# EAGLE board CT_schematic (EAGLE 7.6.0)

Size 100 x 80 mm. Coordinates in mm from the lower left corner, seen from the top.
Outline: 0,0 100,0 100,80 0,80 0,0
Copper layers (1*16): Top 0.035mm / dielectric 1.5mm / Bottom 0.035mm
Design rules "default": minimum track width 10mil, minimum drill 24mil, track to track 8mil, track to pad 8mil, pad to pad 8mil, via to via 8mil, smd to smd 8mil, copper to edge 40mil, drill to drill 8mil, minimum pad ring 10mil, minimum via ring 8mil, stop-mask expansion 4mil, vias tented up to drill 0mil, thermal gap 10mil

## Footprints (pad centres in the part's own frame; a part is rotated, then mirrored left to right if it is on the bottom)
C0603 = smd 0.8 x 0.8: 1 -0.762,0; 2 0.762,0
C0402 = smd 0.5 x 0.5: 1 -0.508,0; 2 0.508,0
2220 = smd 1.85 x 5.5: 1 -2.55,0; 2 2.55,0
C1210 = smd 1.2 x 2.5: 1 -1.524,0; 2 1.524,0
C1206 = smd 1.3 x 1.6: 1 -1.524,0; 2 1.524,0
L0603 = smd 0.8 x 0.8: 1 -0.762,0; 2 0.762,0
R0603 = smd 0.8 x 0.8: 1 -0.762,0; 2 0.762,0
LQFP64 = smd 0.3 x 1.2: 1 -3.75,-5.75; 2 -3.25,-5.75; 3 -2.75,-5.75; 4 -2.25,-5.75; 5 -1.75,-5.75; 6 -1.25,-5.75; 7 -0.75,-5.75; 8 -0.25,-5.75; 9 0.25,-5.75; 10 0.75,-5.75; 11 1.25,-5.75; 12 1.75,-5.75; 13 2.25,-5.75; 14 2.75,-5.75; 15 3.25,-5.75; 16 3.75,-5.75; 33 3.75,5.75; 34 3.25,5.75; 35 2.75,5.75; 36 2.25,5.75; 37 1.75,5.75; 38 1.25,5.75; 39 0.75,5.75; 40 0.25,5.75; 41 -0.25,5.75; 42 -0.75,5.75; 43 -1.25,5.75; 44 -1.75,5.75; 45 -2.25,5.75; 46 -2.75,5.75; 47 -3.25,5.75; 48 -3.75,5.75 | smd 1.2 x 0.3: 17 5.75,-3.75; 18 5.75,-3.25; 19 5.75,-2.75; 20 5.75,-2.25; 21 5.75,-1.75; 22 5.75,-1.25; 23 5.75,-0.75; 24 5.75,-0.25; 25 5.75,0.25; 26 5.75,0.75; 27 5.75,1.25; 28 5.75,1.75; 29 5.75,2.25; 30 5.75,2.75; 31 5.75,3.25; 32 5.75,3.75; 49 -5.75,3.75; 50 -5.75,3.25; 51 -5.75,2.75; 52 -5.75,2.25; 53 -5.75,1.75; 54 -5.75,1.25; 55 -5.75,0.75; 56 -5.75,0.25; 57 -5.75,-0.25; 58 -5.75,-0.75; 59 -5.75,-1.25; 60 -5.75,-1.75; 61 -5.75,-2.25; 62 -5.75,-2.75; 63 -5.75,-3.25; 64 -5.75,-3.75
SOIC-8 = smd 1.6 x 0.6: 1 -2.7,1.905 | smd 1.55 x 0.6: 2 -2.7,0.635; 3 -2.7,-0.635; 4 -2.7,-1.905; 5 2.7,-1.905; 6 2.7,-0.635; 7 2.7,0.635; 8 2.7,1.905
TDFN-8/6MM = smd 0.3 x 0.75: 1 0,0; 2 0.5,0; 3 1,0; 4 1.5,0; 5 1.5,3; 6 1,3; 7 0.5,3; 8 0,3
QFN-32 = smd 0.6 x 0.3: 1 -2.3,1.75; 2 -2.3,1.25; 3 -2.3,0.75; 4 -2.3,0.25; 5 -2.3,-0.25; 6 -2.3,-0.75; 7 -2.3,-1.25; 8 -2.3,-1.75; 17 2.3,-1.75; 18 2.3,-1.25; 19 2.3,-0.75; 20 2.3,-0.25; 21 2.3,0.25; 22 2.3,0.75; 23 2.3,1.25; 24 2.3,1.75 | smd 0.3 x 0.6: 9 -1.75,-2.3; 10 -1.25,-2.3; 11 -0.75,-2.3; 12 -0.25,-2.3; 13 0.25,-2.3; 14 0.75,-2.3; 15 1.25,-2.3; 16 1.75,-2.3; 25 1.75,2.3; 26 1.25,2.3; 27 0.75,2.3; 28 0.25,2.3; 29 -0.25,2.3; 30 -0.75,2.3; 31 -1.25,2.3; 32 -1.75,2.3 | smd 3.2 x 3.2: EXP 0,0
SJ-43515TS-SMT-TR = smd 2.2 x 3: 1 0.6,-7.4; 4 3.4,-7.4 | smd 3 x 3: 2 12.8,-7.4; 5 17,-3 | smd 2 x 3: 3 5.3,0; 6 2.5,0 | drill 1.8: P$7 4.5,-3.69; P$8 11.54,-3.69
WM-64PC = drill 0.6 pad 1: 1 -1,0.95; 2 -1,-0.95
ABS07-32.768KHZ-7-T = smd 1.1 x 2.4: 1 -2.5,0; 2 0,0
ASFL1 = smd 1.7 x 1.5: 1 -1.27,-1.1; 2 1.27,-1.1; 3 1.27,1.1; 4 -1.27,1.1
ASDMB-XX.XXXXMHZ-XX-XX-XXX = smd 0.65 x 0.85: 1 0.45,0.2; 2 2.05,0.2; 3 2.05,1.8; 4 0.45,1.8
MSOP-8_EP = smd 1.422 x 0.508: 1 -2.095,0.975; 2 -2.095,0.325; 3 -2.095,-0.325; 4 -2.095,-0.975; 5 2.095,-0.975; 6 2.095,-0.325; 7 2.095,0.325; 8 2.095,0.975 | smd 1.727 x 1.702: EPAD 0,0
SOIC-8_EP = smd 1.6 x 0.533: 1 -2.921,1.905; 2 -2.921,0.635; 3 -2.921,-0.635; 4 -2.921,-1.905; 5 2.921,-1.905; 6 2.921,-0.635; 7 2.921,0.635; 8 2.921,1.905 | smd 2.54 x 3.302: EPAD 0,0 | drill 0.406 pad 0.406: P$1 -0.508,0.635; P$2 0.381,0.635; P$3 -0.508,-0.635; P$4 0.381,-0.635
DFN8_2X3MC = smd 0.813 x 0.305: 1 -1.398,0.75; 2 -1.398,0.25; 3 -1.398,-0.25; 4 -1.398,-0.75; 5 1.398,-0.75; 6 1.398,-0.25; 7 1.398,0.25; 8 1.398,0.75 | smd 1.753 x 1.549: 9 0,0
JST-2-SMD = smd 1 x 4.6: 1 -1,-3.7; 2 1,-3.7 | smd 1.6 x 3.4: NC1 -3.4,1.5; NC2 3.4,1.5
FCI_10118193-0001LF = smd 0.4 x 1.35: 1 -1.3,2.675; 2 -0.65,2.675; 3 0,2.675; 4 0.65,2.675; 5 1.3,2.675 | smd 1.6 x 1.4: 6 -3.2,2.45; 7 3.2,2.45 | smd 1.9 x 1.9: 8 -1.2,0; 9 1.2,0 | hole 0.5: -3.3,0; 3.3,0
SON-6 = smd 0.55 x 0.3: 1 -0.355,0.5 | smd 0.52 x 0.3: 2 -0.37,0; 3 -0.37,-0.5; 4 0.37,-0.5; 5 0.37,0; 6 0.37,0.5
SW_4-1437565-2 = smd 1.4 x 2.1: 1 -2.23,4.55; 2 -2.23,-4.55; 3 2.23,4.55; 4 2.23,-4.55
LGM67K-G1J2-24-Z = smd 0.8 x 1.4: A -2,0; C 0,0
NC7SZ125M5X = smd 1.3 x 0.7: 1 -1.3,0.95; 2 -1.3,0; 3 -1.3,-0.95; 4 1.3,-0.95; 5 1.3,0.95

## Placement (x,y rotation side)
C1  1e-06  [C0603]  -73.66,74.93 0 top  (outside the outline)
C2  1e-07  [C0603]  -77.47,74.93 0 top  (outside the outline)
C3  1e-07  [C0603]  -15.24,80.01 0 top  (outside the outline)
C4  1e-07  [C0603]  -19.05,80.01 0 top  (outside the outline)
C5  1e-07  [C0603]  -22.86,80.01 0 top  (outside the outline)
C6  4.7e-06  [C0603]  -69.85,74.93 0 top  (outside the outline)
C7  1e-07  [C0603]  -26.67,80.01 0 top  (outside the outline)
C8  1e-07  [C0603]  -30.48,80.01 0 top  (outside the outline)
C9  1e-08  [C0603]  -34.29,80.01 0 top  (outside the outline)
C10  1e-06  [C0603]  -38.1,80.01 0 top  (outside the outline)
C11  1e-11  [C0402]  -49.53,85.09 0 top  (outside the outline)
C12  1e-11  [C0402]  -53.34,85.09 0 top  (outside the outline)
C13  1e-08  [C0402]  -57.15,85.09 0 top  (outside the outline)
C14  1e-08  [C0402]  -60.96,85.09 0 top  (outside the outline)
C15  1e-08  [C0402]  -64.77,85.09 0 top  (outside the outline)
C16  1e-06  [C0603]  -41.91,80.01 0 top  (outside the outline)
C17  1e-06  [C0603]  -45.72,80.01 0 top  (outside the outline)
C18  1e-06  [C0603]  -49.53,80.01 0 top  (outside the outline)
C19  1e-06  [C0603]  -53.34,80.01 0 top  (outside the outline)
C20  1e-06  [C0603]  -57.15,80.01 0 top  (outside the outline)
C21  1e-06  [C0603]  -60.96,80.01 0 top  (outside the outline)
C22  1e-06  [C0603]  -64.77,80.01 0 top  (outside the outline)
C23  1e-07  [C0402]  -68.58,85.09 0 top  (outside the outline)
C24  1e-07  [C0402]  -72.39,85.09 0 top  (outside the outline)
C25  1e-07  [C0402]  -76.2,85.09 0 top  (outside the outline)
C26  1e-07  [C0402]  -80.01,85.09 0 top  (outside the outline)
C27  1e-06  [C0603]  -68.58,80.01 0 top  (outside the outline)
C28  1e-08  [C0402]  -15.24,90.17 0 top  (outside the outline)
C29  1e-08  [C0402]  -19.05,90.17 0 top  (outside the outline)
C30  6.8e-05  [2220]  -49.53,52.07 0 top  (outside the outline)
C31  1e-06  [C0603]  -72.39,80.01 0 top  (outside the outline)
C32  6.8e-05  [2220]  -57.15,52.07 0 top  (outside the outline)
C33  1e-05  [C1210]  -68.58,59.69 0 top  (outside the outline)
C34  1e-05  [C1210]  -74.93,59.69 0 top  (outside the outline)
C35  1e-05  [C1210]  -16.51,69.85 0 top  (outside the outline)
C36  1e-05  [C1210]  -22.86,69.85 0 top  (outside the outline)
C37  1e-07  [C0402]  -22.86,90.17 0 top  (outside the outline)
C38  1e-05  [C1206]  -29.21,69.85 0 top  (outside the outline)
C39  1e-05  [C1206]  -35.56,69.85 0 top  (outside the outline)
C40  1e-08  [C0402]  -26.67,90.17 0 top  (outside the outline)
F1  240.0  [L0603]  -76.2,80.01 0 top  (outside the outline)
R2  1000.0  [R0603]  -80.01,80.01 0 top  (outside the outline)
R4  4700.0  [R0603]  -15.24,85.09 0 top  (outside the outline)
R5  2200.0  [R0603]  -19.05,85.09 0 top  (outside the outline)
R6  2200.0  [R0603]  -22.86,85.09 0 top  (outside the outline)
R7  10000.0  [R0603]  -73.66,68.58 0 top  (outside the outline)
R8  10000.0  [R0603]  -78.74,68.58 0 top  (outside the outline)
R9  10000.0  [R0603]  -15.24,74.93 0 top  (outside the outline)
R10  10000.0  [R0603]  -20.32,74.93 0 top  (outside the outline)
R11  10000.0  [R0603]  -25.4,74.93 0 top  (outside the outline)
R12  10000.0  [R0603]  -30.48,74.93 0 top  (outside the outline)
R13  10000.0  [R0603]  -35.56,74.93 0 top  (outside the outline)
R14  10000.0  [R0603]  -40.64,74.93 0 top  (outside the outline)
R15  1270.0  [R0603]  -26.67,85.09 0 top  (outside the outline)
R16  1270.0  [R0603]  -30.48,85.09 0 top  (outside the outline)
R17  3900.0  [R0603]  -34.29,85.09 0 top  (outside the outline)
R18  2200.0  [R0603]  -38.1,85.09 0 top  (outside the outline)
R19  10000.0  [R0603]  -45.72,74.93 0 top  (outside the outline)
R20  4031.5447154472  [R0603]  -58.42,68.58 0 top  (outside the outline)
R21  2200.0  [R0603]  -41.91,85.09 0 top  (outside the outline)
R22  10000.0  [R0603]  -50.8,74.93 0 top  (outside the outline)
R23  10000.0  [R0603]  -55.88,74.93 0 top  (outside the outline)
R24  82000.0  [R0603]  -60.96,74.93 0 top  (outside the outline)
R25  300000.0  [R0603]  -63.5,68.58 0 top  (outside the outline)
R26  120000.0  [R0603]  -68.58,68.58 0 top  (outside the outline)
R27  2000.0  [R0603]  -45.72,85.09 0 top  (outside the outline)
R28  10000.0  [R0603]  -66.04,74.93 0 top  (outside the outline)
U1  stm32f098rct7  [LQFP64]  -50.8,29.21 0 top  (outside the outline)
U2  AT25010B-SSHL-T  [SOIC-8]  -24.13,52.07 0 top  (outside the outline)
U3  AT25160B-SSHL-T  [SOIC-8]  -40.64,52.07 0 top  (outside the outline)
U4  24AA02T-I/MNY  [TDFN-8/6MM]  -66.04,40.64 0 top  (outside the outline)
U5  SGTL5000XNAA3  [QFN-32]  -49.53,41.91 0 top  (outside the outline)
U6  SJ-43515TS-SMT-TR  [SJ-43515TS-SMT-TR]  -45.72,10.16 0 top  (outside the outline)
U7  SJ-43515TS-SMT-TR  [SJ-43515TS-SMT-TR]  -73.66,10.16 0 top  (outside the outline)
U8  SJ-43515TS-SMT-TR  [SJ-43515TS-SMT-TR]  -39.37,31.75 0 top  (outside the outline)
U9  WM-64PCT  [WM-64PC]  -35.56,41.91 0 top  (outside the outline)
U10  ABS07-32.768KHZ-7-T  [ABS07-32.768KHZ-7-T]  -39.37,60.96 0 top  (outside the outline)
U11  ASFL-24.57MHZ-NCS  [ASFL1]  -76.2,52.07 0 top  (outside the outline)
U12  ASDMB-25.000MHZ-EC-T  [ASDMB-XX.XXXXMHZ-XX-XX-XXX]  -16.51,1.27 0 top  (outside the outline)
U13  MIC47100YMME  [MSOP-8_EP]  -41.91,68.58 0 top  (outside the outline)
U14  MIC5234YME  [SOIC-8_EP]  -48.26,59.69 0 top  (outside the outline)
U15  MCP73831T-2ACI/MC  [DFN8_2X3MC]  -35.56,88.9 0 top  (outside the outline)
U16  S2B-PH-SM4-TB(LF)(SN)  [JST-2-SMD]  -22.86,43.18 0 top  (outside the outline)
U17  10118193-0001LF  [FCI_10118193-0001LF]  -19.05,60.96 0 top  (outside the outline)
U18  TPS3895ADRYR  [SON-6]  -29.21,88.9 0 top  (outside the outline)
U19  4-1437565-2  [SW_4-1437565-2]  -72.39,27.94 0 top  (outside the outline)
U20  Q65110A2395  [LGM67K-G1J2-24-Z]  -57.15,59.69 0 top  (outside the outline)
U21  nc7sz125m5x  [NC7SZ125M5X]  -48.26,68.58 0 top  (outside the outline)

## Library data of the parts
C1-C40 F1 R2 R4-R28 U1-U21 = circuit_tree

## Nets
CLK_CRYSTAL_U1_3: C11.1 U1.3 U10.1
CLK_CRYSTAL_U1_4: C12.1 U1.4 U10.2
CLK_U1_5: U1.5 U12.3
CLK_U5_21: U5.21 U11.3
GND: C1.2 C2.2 C3.2 C4.2 C5.2 C6.2 C7.2 C8.2 C9.2 C10.2 C11.2 C12.2 C13.2 C14.2 C15.2 C23.2 C24.2 C25.2 C26.2 C27.2 C28.2 C29.2 C30.2 C31.2 C32.2 C33.2 C34.2 C35.2 C36.2 C37.2 C38.2 C39.2 C40.2 R2.2 R7.2 R8.2 R16.2 R18.2 R21.2 R24.2 R26.2 R27.2 U1.12 U1.18 U1.31 U1.47 U1.63 U2.4 U3.4 U4.4 U5.1 U5.3 U5.7 U5.EXP U7.1 U8.1 U9.2 U11.2 U12.2 U13.3 U13.EPAD U14.7 U14.EPAD U15.6 U15.9 U16.2 U17.5 U17.6 U17.7 U17.8 U17.9 U18.2 U20.C U21.1 U21.3
INPUT_USBPOWER_5V: C38.1 R28.2 U15.1 U15.2 U17.1
NET_U1_6: R5.1 U1.6 U4.6
NET_U1_7: R4.1 U1.7 U21.4
NET_U1_13: C9.1 C10.1 F1.1 U1.13
NET_U1_28: R8.1 U1.28
NET_U1_43: R6.1 U1.43 U4.5
NET_U1_60: R7.1 U1.60
NET_U1_61: U20.A
NET_U1_62: U19.3 U19.4
NET_U2_3: R9.1 U2.3
NET_U2_7: R11.1 U2.7
NET_U3_3: R12.1 U3.3
NET_U3_7: R14.1 U3.7
NET_U5_10: C26.1 U5.10
NET_U5_29: R15.1 U5.29
NET_U5_31: R16.1 U5.31
NET_U6_1: U5.4 U6.1
NET_U6_2: U5.2 U6.2
NET_U6_5: U5.6 U6.5
NET_U7_2: C17.1 U7.2
NET_U7_5: C16.1 U7.5
NET_U7_11: C17.2
NET_U7_12: C16.2
NET_U8_2: C19.1 C20.1 U8.2
NET_U8_5: C18.1 U8.5
NET_U8_13: C19.2 C20.2
NET_U8_14: C18.2
NET_U9_1: C21.1 C22.1 C27.1 U5.16 U9.1
NET_U9_15: C21.2 C22.2
NET_U13_6: R17.2 R18.1 U13.6
NET_U14_4: R20.2 R21.1 U14.4
NET_U15_5: R28.1 U15.5
NET_U15_8: R27.1 U15.8
NET_U18_1: R23.1 R24.1 U18.1
NET_U18_3: R25.2 R26.1 U18.3
NET_U18_4: R22.1 U18.4 U21.2
NET_U19_1: R2.1 U19.1 U19.2
PROC_I2S1_CK: U1.55 U5.24
PROC_I2S1_SD: U1.57 U5.26
PROC_I2S1_WS: U1.50 U5.23
PROC_SPI1_MISO: U1.22 U3.2
PROC_SPI1_MOSI: U1.23 U3.5
PROC_SPI1_NSS: R13.1 U1.20 U3.1
PROC_SPI1_SCK: U1.21 U3.6
PROC_SPI2_MISO: U1.10 U2.2
PROC_SPI2_MOSI: U1.11 U2.5
PROC_SPI2_NSS: R10.1 U1.33 U2.1
PROC_SPI2_SCK: U1.29 U2.6
VCC_S1_3V7: C30.1 C31.1 C33.1 C34.1 C39.1 R19.1 R19.2 U13.1 U13.2 U13.4 U13.5 U14.5 U14.8 U15.3 U15.4 U16.1
VCC_TIER1_1V8: C1.1 C2.1 C3.1 C4.1 C5.1 C6.1 C7.1 C8.1 C13.1 C14.1 C15.1 C23.1 C24.1 C25.1 C29.1 C32.1 C37.1 C40.1 F1.2 R4.2 R5.2 R6.2 R9.2 R10.2 R11.2 R12.2 R13.2 R14.2 R15.2 R17.1 R22.2 R23.2 R25.1 U1.1 U1.19 U1.32 U1.48 U1.64 U2.8 U3.8 U4.7 U4.8 U5.5 U5.20 U5.30 U12.4 U13.7 U13.8 U18.6 U21.5
VCC_TIER1_3V3: C28.1 C35.1 C36.1 R20.1 U11.4 U14.1

## Tracks (layer width: path | path; a pad name or v marks a point on that pad's centre or on a via)
CLK_CRYSTAL_U1_3  (2 unrouted)
CLK_CRYSTAL_U1_4  (2 unrouted)
CLK_U1_5  (1 unrouted)
CLK_U5_21  (1 unrouted)
GND  (74 unrouted)
INPUT_USBPOWER_5V  (4 unrouted)
NET_U1_6  (2 unrouted)
NET_U1_7  (2 unrouted)
NET_U1_13  (3 unrouted)
NET_U1_28  (1 unrouted)
NET_U1_43  (2 unrouted)
NET_U1_60  (1 unrouted)
NET_U1_62  (1 unrouted)
NET_U2_3  (1 unrouted)
NET_U2_7  (1 unrouted)
NET_U3_3  (1 unrouted)
NET_U3_7  (1 unrouted)
NET_U5_10  (1 unrouted)
NET_U5_29  (1 unrouted)
NET_U5_31  (1 unrouted)
NET_U6_1  (1 unrouted)
NET_U6_2  (1 unrouted)
NET_U6_5  (1 unrouted)
NET_U7_2  (1 unrouted)
NET_U7_5  (1 unrouted)
NET_U8_2  (2 unrouted)
NET_U8_5  (1 unrouted)
NET_U8_13  (1 unrouted)
NET_U9_1  (4 unrouted)
NET_U9_15  (1 unrouted)
NET_U13_6  (2 unrouted)
NET_U14_4  (2 unrouted)
NET_U15_5  (1 unrouted)
NET_U15_8  (1 unrouted)
NET_U18_1  (2 unrouted)
NET_U18_3  (2 unrouted)
NET_U18_4  (2 unrouted)
NET_U19_1  (2 unrouted)
PROC_I2S1_CK  (1 unrouted)
PROC_I2S1_SD  (1 unrouted)
PROC_I2S1_WS  (1 unrouted)
PROC_SPI1_MISO  (1 unrouted)
PROC_SPI1_MOSI  (1 unrouted)
PROC_SPI1_NSS  (2 unrouted)
PROC_SPI1_SCK  (1 unrouted)
PROC_SPI2_MISO  (1 unrouted)
PROC_SPI2_MOSI  (1 unrouted)
PROC_SPI2_NSS  (2 unrouted)
PROC_SPI2_SCK  (1 unrouted)
VCC_S1_3V7  (15 unrouted)
VCC_TIER1_1V8  (49 unrouted)
VCC_TIER1_3V3  (5 unrouted)